# Altium PCB LinkIt Smart 7688 Duo.PcbDoc (part 1 of 3)
Units mil, origin at the board's own origin, x right, y up, seen from the top; angles counter-clockwise.
Board outline 2393.7 x 1023.62 mil, 4 copper layers (Top Layer, Mid Layer 1, Mid Layer 2, Bottom Layer), stack 40 mil thick; 184 components, 153 nets, 759 pads, 3026 vias.
Unrouted connection lines stored in the file: 1.
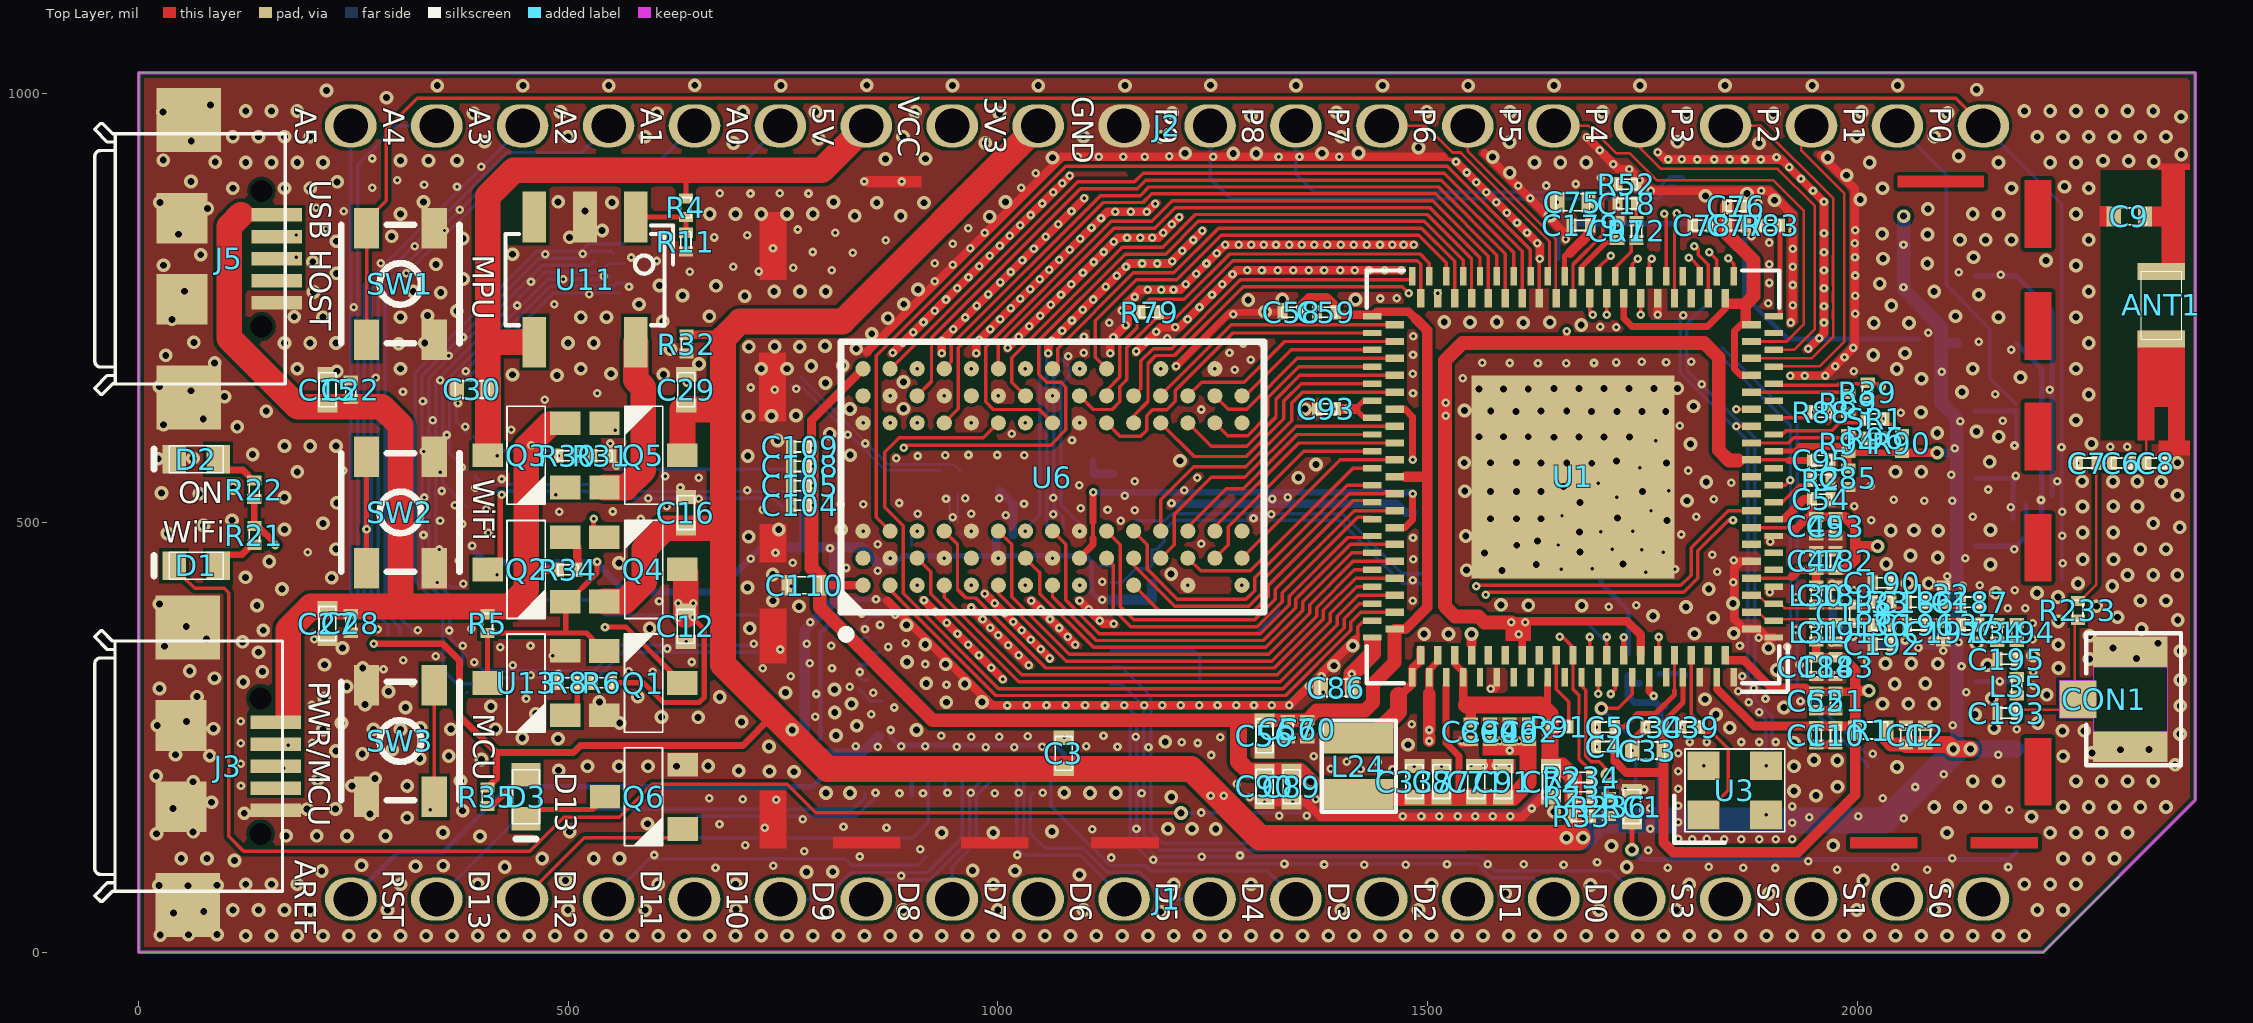
[diagram p0: Top Layer view]
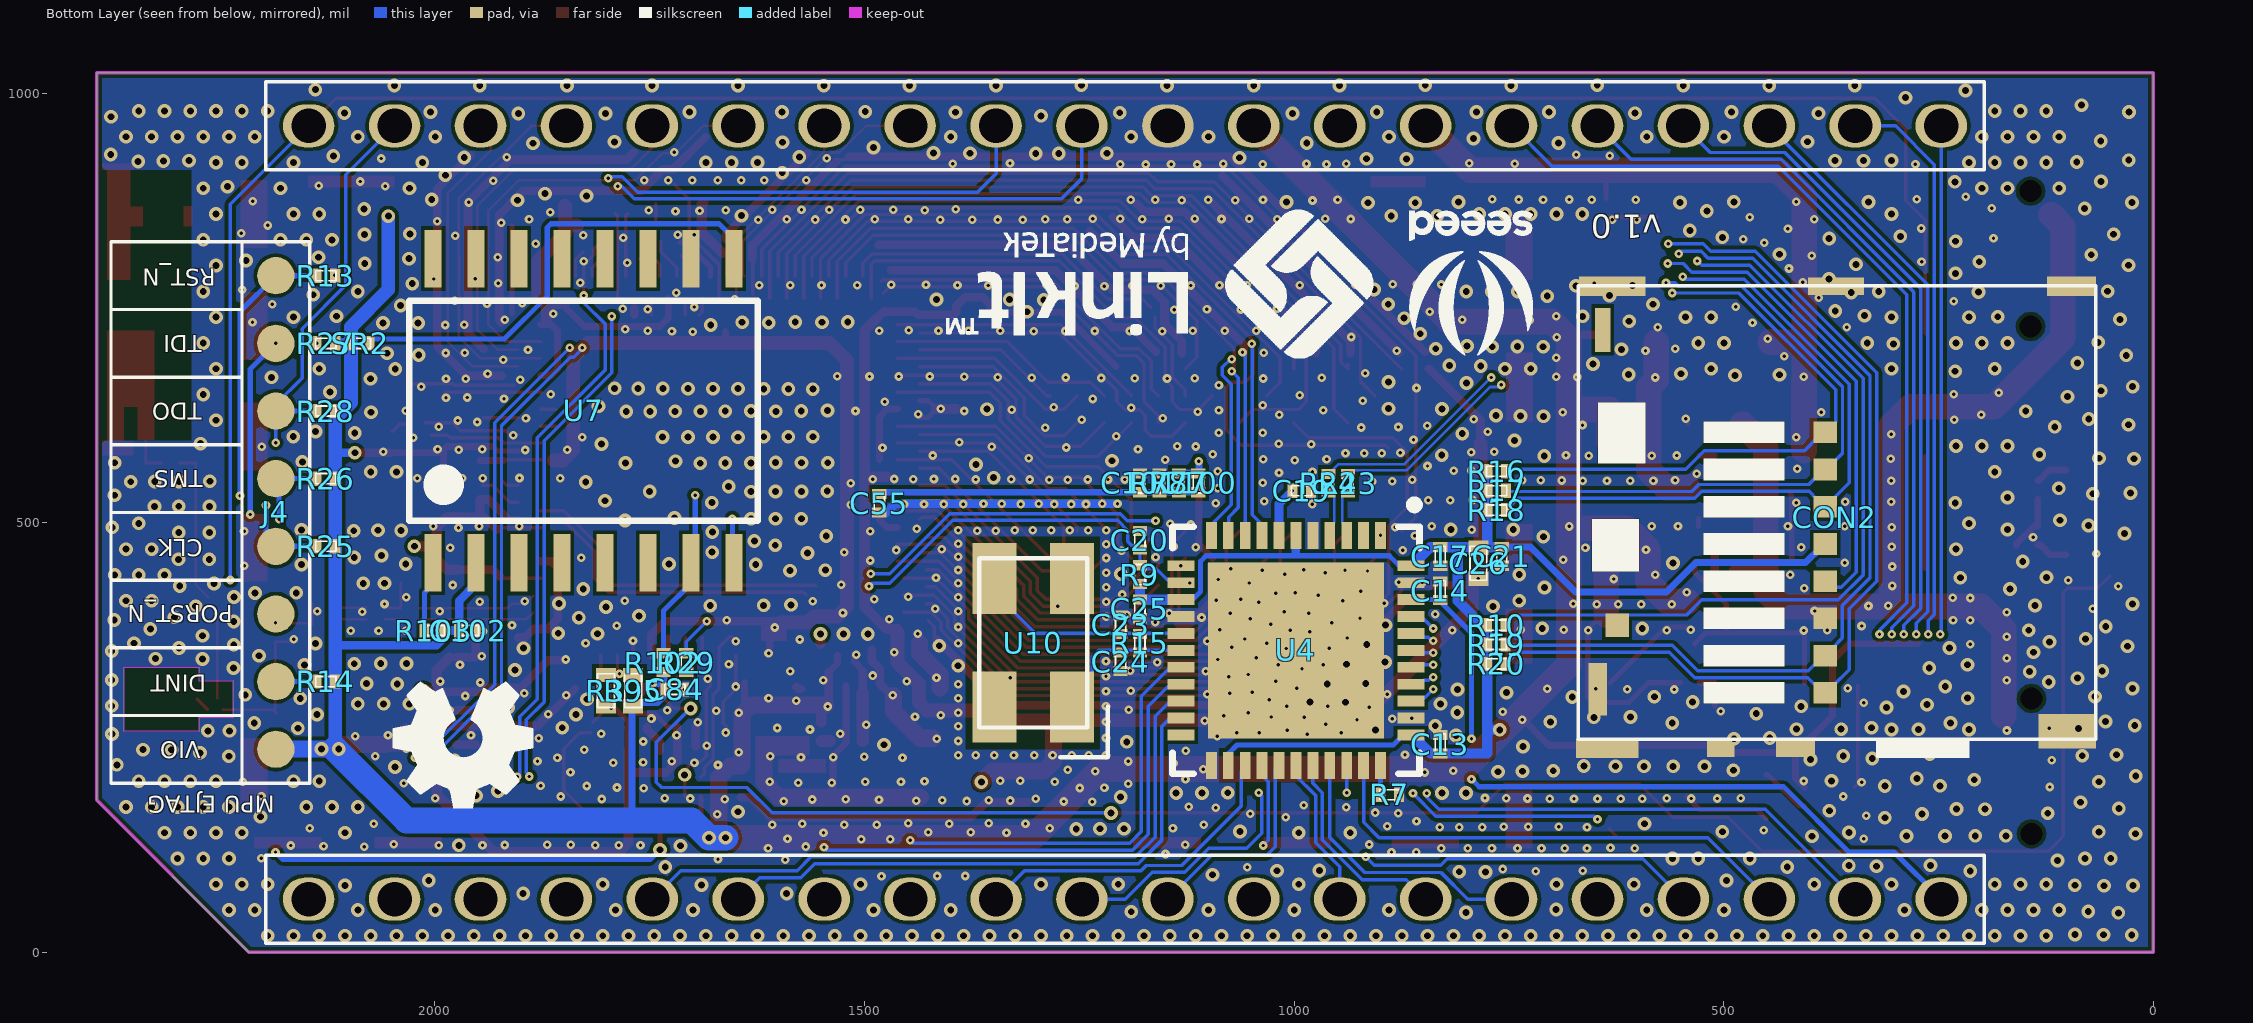
[diagram p1: Bottom Layer view, seen from below]
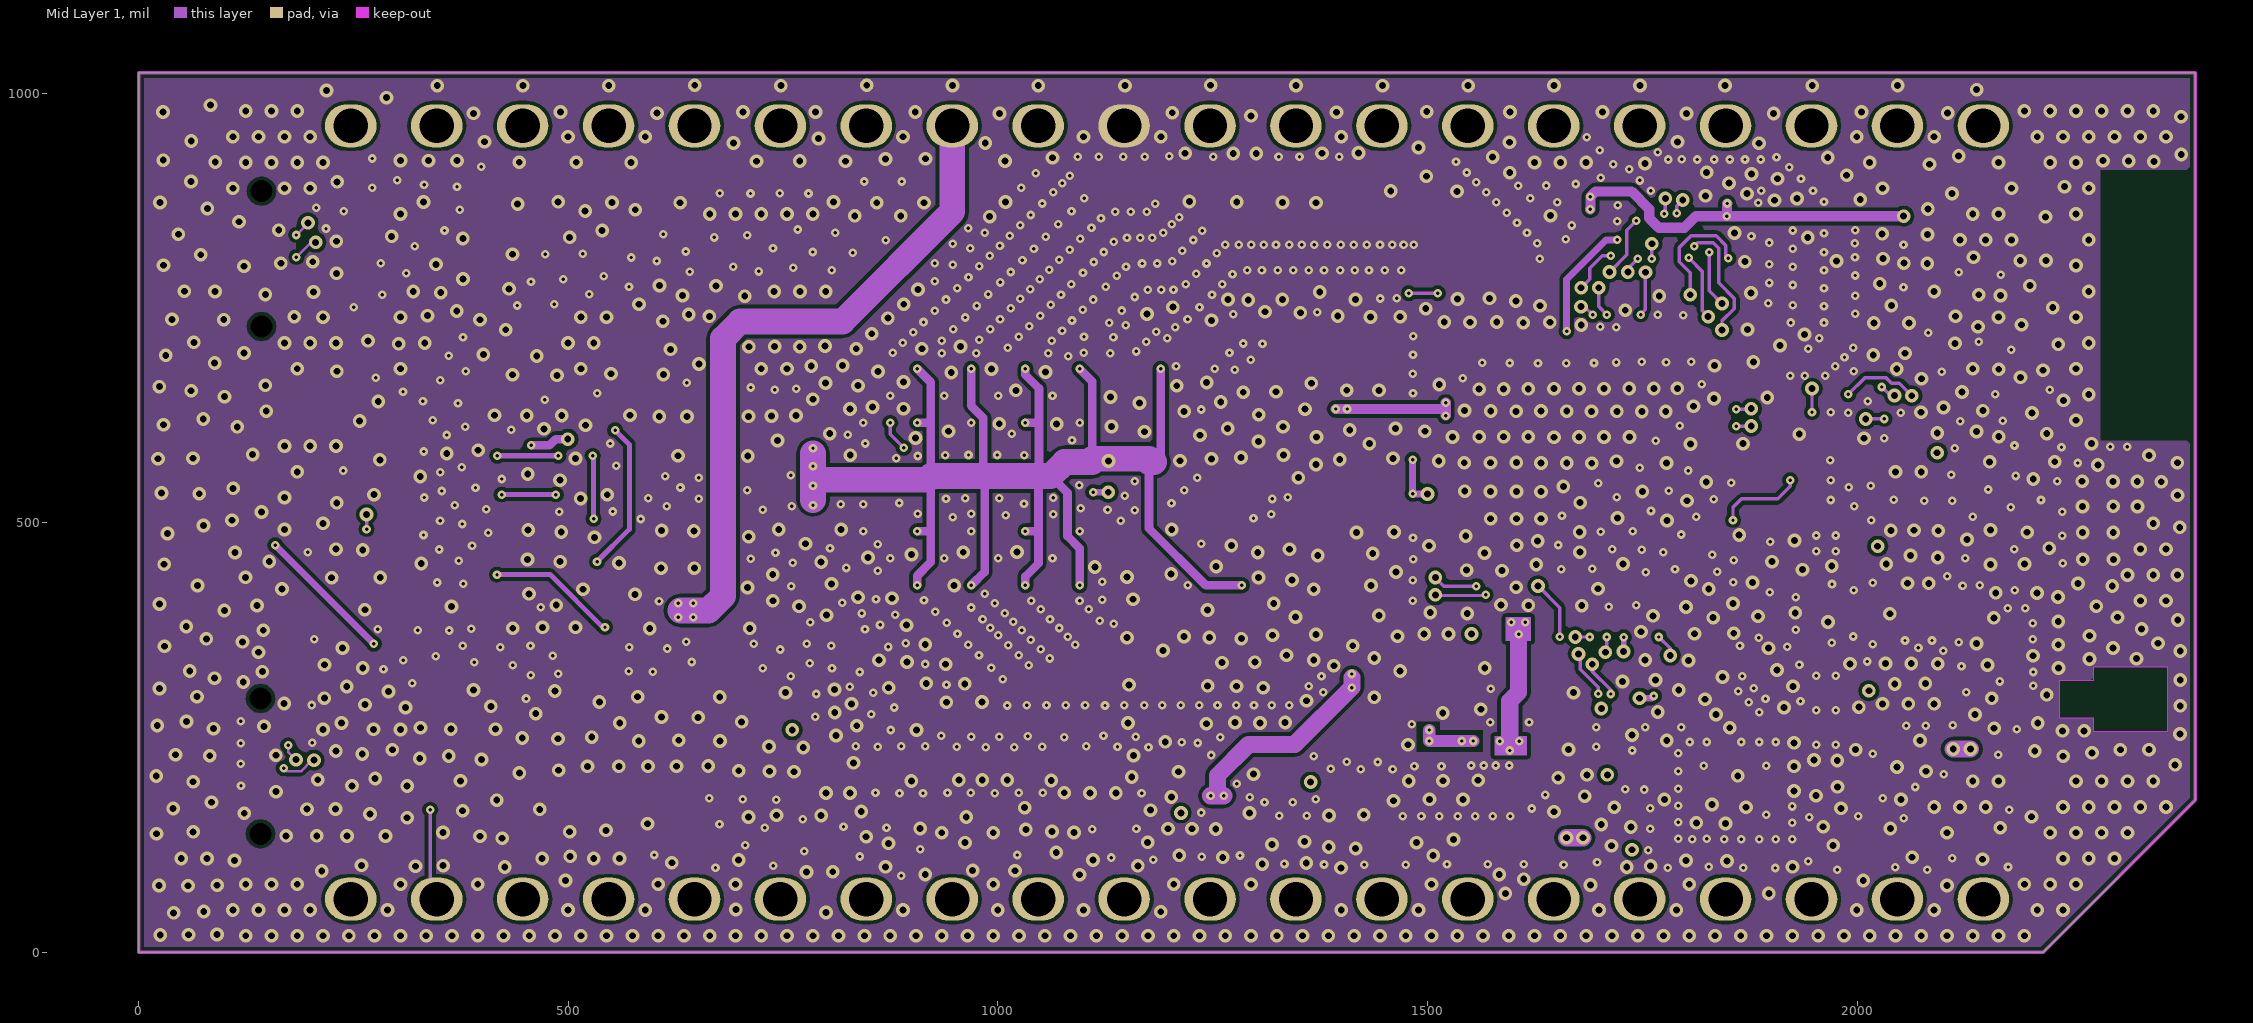
[diagram p2: Mid Layer 1]
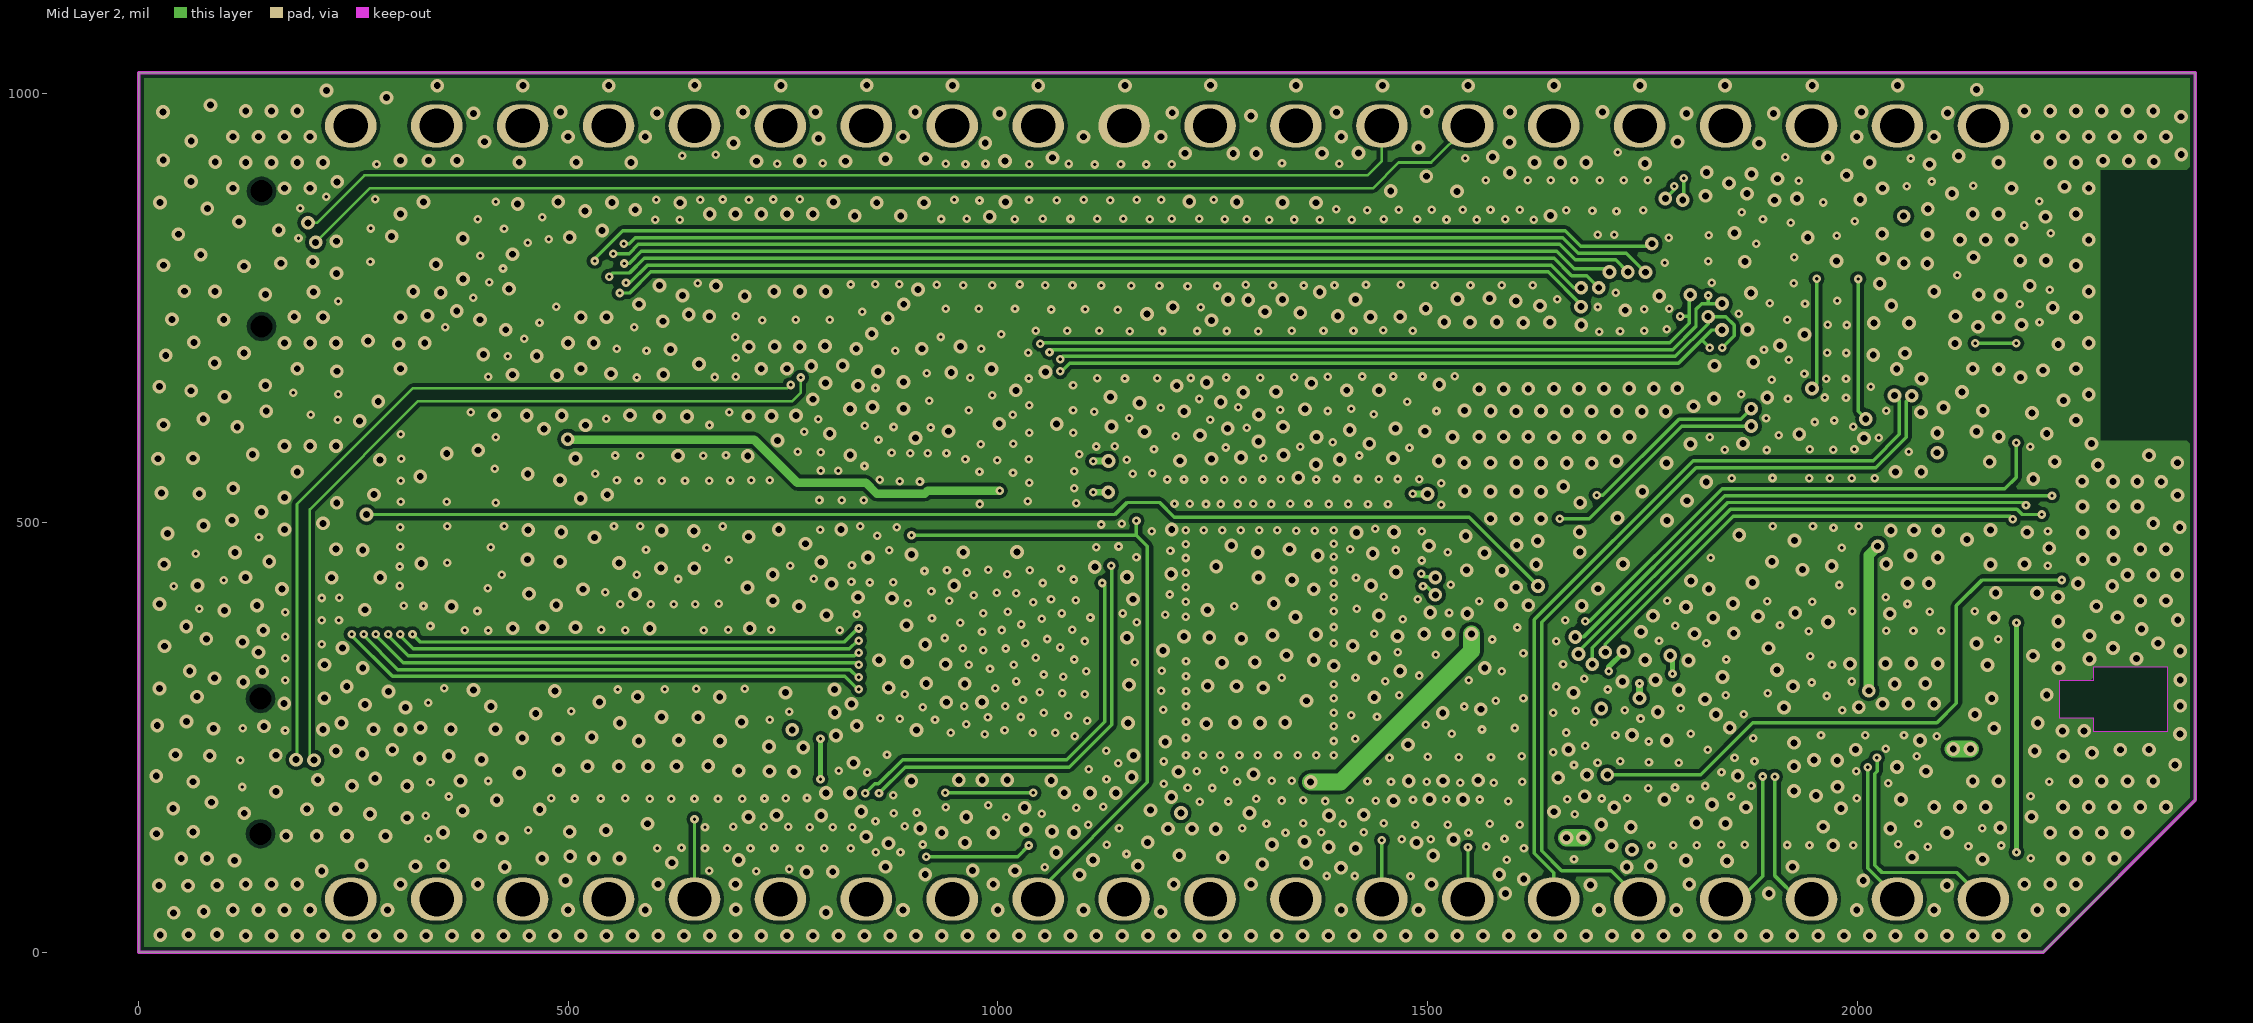
[diagram p3: Mid Layer 2]

## Layer stack, top to bottom
Top Layer: signal copper 1.0984
Dielectric1: core 2.4016, FR-4, Dk 3.3
Mid Layer 1: signal copper 1.5
Dielectric 3: prepreg 30, Dk 3.3
Mid Layer 2: signal copper 1.5
Dielectric 2: core 2.4016, FR-4, Dk 3.3
Bottom Layer: signal copper 1.0984

## Board outline
0,0 0,1023.62 2393.7,1023.62 2393.7,177.17 2216.54,0

## Design rules (kind name [scope] priority, off if disabled: settings)
Clearance [All] p1: gap=4
Clearance Keep [OnLayer('Keep-Out Layer') vs OnLayer('Top Layer')] p2: gap=4
Clearance Keep2 [OnLayer('Keep-Out Layer') vs OnLayer('Bottom Layer')] p3: gap=4
Clearance RF_IN [InPolygon vs (InNetClass('RFClass'))] p4: gap=5
DiffPairsRouting DiffPairsRouting_1 [(InNet('GPIO14 / MDI_TP_P1') OR InNet('GPIO15 / MDI_TN_P1') OR InNet('#RESET') OR InNet('#RESET'))] p1: maxlimit=10 minlimit=10 mostfreqgap=10 toplayer_minwidth=15 toplayer_maxwidth=15 toplayer_prefwidth=15 midlayer1_minwidth=15 midlayer1_maxwidth=15 midlayer1_prefwidth=15 midlayer2_minwidth=15 midlayer2_maxwidth=15 midlayer2_prefwidth=15 bottomlayer_minwidth=15 bottomlayer_maxwidth=15 bottomlayer_prefwidth=15 maxuncoupledlength=500
DiffPairsRouting [All] p2: maxlimit=10 minlimit=10 mostfreqgap=10 toplayer_minwidth=15 toplayer_maxwidth=15 toplayer_prefwidth=15 midlayer1_minwidth=15 midlayer1_maxwidth=15 midlayer1_prefwidth=15 midlayer2_minwidth=15 midlayer2_maxwidth=15 midlayer2_prefwidth=15 bottomlayer_minwidth=15 bottomlayer_maxwidth=15 bottomlayer_prefwidth=15 maxuncoupledlength=500
FabricationTestPointUsage TestPointUsage [All] p1: valid=0 allowmultiple=FALSE
FabricationTestpoint Testpoint [(IsPad And (OnTopLayer Or OnBottomLayer))] p1: side=3 testpointundercomponent=TRUE minsize=40 maxsize=100 preferedsize=60 minholesize=0 maxholesize=40 preferedholesize=32 testpointgrid=1 allowsidetop=TRUE allowsidebottom=TRUE usegrid=TRUE gridtolerance=0.01
HoleSize [All] p1: absolutevalues=TRUE maxlimit=260 minlimit=1 maxpercent=80.000 minpercent=20.000
PlaneConnect [All] p1: planeconnectstyle=Direct reliefexpansion=20 reliefentries=4 reliefconductorwidth=10 reliefairgap=10
PolygonConnect PolygonConnect_2 [(InPadClass('GND_Class'))] p1: connectstyle=Relief reliefconductorwidth=15 reliefentries=4 polygonreliefangle="90 Angle" airgapwidth=10
PolygonConnect PolygonConnect_1 [(InComponent('X') or InComponent('Y'))] p2: connectstyle=Relief reliefconductorwidth=20 reliefentries=4 polygonreliefangle="90 Angle" airgapwidth=10
PolygonConnect [All] p3: connectstyle=Direct reliefconductorwidth=10 reliefentries=4 polygonreliefangle="90 Angle" airgapwidth=10
RoutingVias [All] p1: holewidth=28 width=50 viastyle="Through Hole" minholewidth=4 minwidth=10 maxholewidth=28 maxwidth=50
SilkToSolderMaskClearance SilkscreenOverComponentPads [IsPad] p1: minsilkscreentomaskgap=10 clearancetoexposedcopper=TRUE
SolderMaskExpansion [All] p1: expansion=2
Width [All] p1: maxlimit=60 minlimit=3 preferedwidth=10
24 further rules are at their usual default settings.

## Classes and differential pairs
component class "16-MT7628AN Power-F": C84 C85 C86 C87 C88 C89 C90 C91 C92 C93 C94 C95 C96 C97 C337 L24
component class "15-MT7688AN Ethernet-E": C18 C21 C26 C76 C77 C78 CON2 J4 R10 R12 R13 R14 R16 R17 R18 R19 R20 R25 R26 R27 R28 R29 R83
component class "14-MT7688AN USB-PCIe": C15 C22 C71 C72 C75 C179 J5 R52
component class "13-MT7688AN Peripheral-C": C12 C13 C14 C16 C17 C19 C20 C23 C24 C25 C27 C28 C29 C30 C102 D1 D2 D3 J1 J2 J3 Q1 Q2 Q3 Q4 Q5 Q6 R2 R3 R4 R5 R6 R7 R8 R9 R11 R15 R21 R22 R23 R24 R30 R31 R32 R33 R34 R35 R39 R88 R89 R90 R91 R94 R95 R96 R102 R103 R234 R235 R236 RC1 SR1 SR2 SW1 SW2 SW3 U4 U7 U10 U11 U13
component class "12-MT7628AN DDR2 I_F-B": C55 C56 C57 C58 C59 C60 C100 C101 C104 C105 C108 C109 C110 R77 R78 R79 U6
pad class GND_Class: U15-43
component class "11-MT7688AN RF Front End": ANT1 C1 C2 C3 C4 C5 C6 C7 C8 C9 C10 C11 C33 C34 C39 C47 C49 C51 C52 C53 C54 C182 C183 C184 C186 C187 C188 C189 C190 C191 C192 C193 C194 C195 C196 C197 CON1 L30 L31 L32 L33 L34 L35 L36 L37 R1 R233 U1 U3

## Components (designator, comment, footprint, x,y, rotation, side; value= is the part's Value field where it differs from the comment)
ANT1 "ACA-2012-A1-CC-S" ACA-2012A 2354.1,752.97 r90 top locked
C1 "10pF" "RLC 0201 M35" 2056.69,252.76 r270 top
C2 "1uF" "RLC 0201 M35" 2079.33,252.76 r270 top
C3 "10uF" "RLC 0402 M35" 1076.57,231.5 r270 top
C4 "1uF" "RLC 0201 M35" 1707.01,239.33 r0 top
C5 "100pF" "RLC 0201 M35" 1707.01,261.97 r0 top
C6 "0.6pF" "RLC 0201 M35" 2307.54,569.39 r180 top
C7 "NI" "RLC 0201 M35" 2267.58,569.39 r0 top
C8 "1.5pF" "RLC 0201 M35" 2347.5,569.39 r180 top
C9 "NI" "RLC 0402 M35" 2316.79,856.4 r0 top locked
C10 "1uF" "RLC 0201 M35" 1974.92,252.52 r90 top
C11 "100pF" "RLC 0201 M35" 1952.28,252.52 r90 top
C12 "10uF" "RLC 0402 M35" 636.77,379.25 r90 top
C13 "0.1uF" "RLC 0201 M35" 829.92,242.13 r90 bottom
C14 "0.1uF" "RLC 0201 M35" 829.92,420.67 r270 bottom
C15 "10uF" "RLC 0402 M35" 219.76,654.68 r90 top
C16 "10uF" "RLC 0402 M35" 636.93,511.69 r270 top
C17 "1uF" "RLC 0201 M35" 829.92,460.63 r90 bottom
C18 "NI" "RLC 0201 M35" 1732.09,871.26 r0 top
C19 "0.1uF" "RLC 0201 M35" 991.14,537.2 r0 bottom
C20 "0.1uF" "RLC 0201 M35" 1179.33,479.53 r270 bottom
C21 "0.1uF" "RLC 0201 M35" 758.27,460.63 r90 bottom
C22 "0.1uF" "RLC 0201 M35" 246.81,654.76 r90 top
C23 "18pF" "RLC 0201 M35" 1201.97,381.3 r270 bottom
C24 "18pF" "RLC 0201 M35" 1201.97,337.99 r90 bottom
C25 "0.1uF" "RLC 0201 M35" 1179.33,399.61 r90 bottom
C26 "10uF" "RLC 0402 M35" 785.43,452.76 r90 bottom
C27 "10uF" "RLC 0402 M35" 219.65,382.6 r90 top
C28 "0.1uF" "RLC 0201 M35" 246.73,382.68 r90 top
C29 "10uF" "RLC 0402 M35" 637.24,654.61 r270 top
C30 "10uF" "RLC 0402 M35" 388.19,654.96 r0 top
C33 "2.2uF" "RLC 0402 M35" 1756.42,234.8 r0 top
C34 "100pF" "RLC 0201 M35" 1764.29,261.97 r0 top
C39 "3pF" "RLC 0201 M35" 1806.1,262.01 r0 top
C47 "100pF" "RLC 0201 M35" 1952.28,455.87 r270 top
C49 "100pF" "RLC 0201 M35" 1952.28,495.83 r90 top
C51 "1uF" "RLC 0201 M35" 1974.92,292.48 r90 top
C52 "100pF" "RLC 0201 M35" 1952.28,292.48 r90 top
C53 "1uF" "RLC 0201 M35" 1974.92,495.83 r90 top
C54 "100pF" "RLC 0201 M35" 1958.27,527.17 r180 top
C55 "0.1uF" "RLC 0201 M35" 1482.68,522.64 r90 bottom
C56 "2.2uF" "RLC 0402 M35" 1310.24,251.77 r90 top
C57 "1uF" "RLC 0201 M35" 1337.4,259.65 r90 top
C58 "1uF" "RLC 0201 M35" 1342.13,744.88 r0 top
C59 "1.5nF" "RLC 0201 M35" 1382.28,744.88 r0 top
C60 "1.5nF" "RLC 0201 M35" 1360.04,259.65 r90 top
C71 "4.7uF" "RLC 0402 M35" 1556.69,198.62 r270 top
C72 "4.7uF" "RLC 0402 M35" 1643.7,198.62 r90 top
C75 "4.7uF" "RLC 0402 M35" 1669.09,872.83 r0 top
C76 "1uF" "RLC 0201 M35" 1859.45,868.5 r180 top
C77 "0.1uF" "RLC 0201 M35" 1859.45,845.87 r180 top
C78 "0.1uF" "RLC 0201 M35" 1819.49,845.87 r0 top
C84 "0.1uF" "RLC 0201 M35" 1720.67,305.83 r0 bottom
C85 "0.1uF" "RLC 0201 M35" 1989.57,552.17 r90 top
C86 "2.2uF" "RLC 0402 M35" 1393.9,307.87 r0 top
C87 "10uF" "RLC 0402 M35" 1516.26,198.58 r270 top
C88 "1uF" "RLC 0201 M35" 1550.2,256.69 r90 top
C89 "2.2uF" "RLC 0402 M35" 1341.75,192.8 r90 top
C90 "4.7uF" "RLC 0402 M35" 1310.24,192.91 r90 top
C91 "4.7uF" "RLC 0402 M35" 1588.19,198.62 r270 top
C92 "0.1uF" "RLC 0201 M35" 1618.11,256.69 r270 top
C93 "0.1uF" "RLC 0201 M35" 1382.28,632.28 r0 top
C94 "0.1uF" "RLC 0201 M35" 1572.83,256.69 r270 top
C95 "0.1uF" "RLC 0201 M35" 1958.27,572.44 r180 top
C96 "0.1uF" "RLC 0201 M35" 1595.47,256.69 r270 top
C97 "0.1uF" "RLC 0201 M35" 1720.67,839.96 r270 top
C100 "0.1uF" "RLC 0201 M35" 1111.42,546.26 r90 bottom
C101 "0.1uF" "RLC 0201 M35" 1179.33,546.26 r270 bottom
C102 "0.1uF" "RLC 0201 M35" 1960.98,374.45 r0 bottom
C104 "0.1uF" "RLC 0201 M35" 770.2,520.24 r0 top
C105 "0.1uF" "RLC 0201 M35" 770.2,542.87 r0 top
C108 "0.1uF" "RLC 0201 M35" 770.2,565.51 r0 top
C109 "0.1uF" "RLC 0201 M35" 770.2,588.15 r0 top
C110 "4.7uF" "RLC 0402 M35" 774.53,427.13 r0 top
C179 "0.1uF" "RLC 0201 M35" 1678.54,845.87 r0 top
C182 "1uF" "RLC 0201 M35" 1974.92,455.87 r270 top
C183 "1uF" "RLC 0201 M35" 1974.92,332.44 r90 top
C184 "100pF" "RLC 0201 M35" 1952.28,332.44 r90 top
C186 "10pF" "RLC 0201 M35" 2069.02,407.44 r180 top
C187 "1.2pF" "RLC 0201 M35" 2131.61,407.44 r180 top
C188 "NI" "RLC 0201 M35" 1997.44,394.09 r90 top
C189 "2pF" "RLC 0201 M35" 1974.92,415.71 r270 top
C190 "NI" "RLC 0201 M35" 2028.94,429.96 r0 top
C191 "2pF" "RLC 0201 M35" 1974.92,372.4 r270 top
C192 "NI" "RLC 0201 M35" 2028.94,358.43 r180 top
C193 "3pF" "RLC 0201 M35" 2174.21,278.35 r0 top
C194 "9pF" "RLC 0201 M35" 2185.63,372.24 r90 top
C195 "3pF" "RLC 0201 M35" 2174.21,340.94 r0 top
C196 "10pF" "RLC 0201 M35" 2069.02,381.06 r180 top
C197 "1.2pF" "RLC 0201 M35" 2100.2,372.44 r90 top
C337 "10uF" "RLC 0402 M35" 1484.76,198.58 r270 top
CON1 "MHF-IPEX" "I-PEX SOCKET" 2317.91,294.49 r270 top
CON2 "MicroSD Connector" MICROSD-ST11S008V4H 66.85,511.81 r90 bottom locked
D1 "LED (Orange)" "LED 0603"#1 66.93,449.8 r0 top locked
D2 "LED (Green)" "LED 0603"#1 66.93,573.82 r0 top locked
D3 "LED (Green)" "LED 0603"#2 450.71,180.94 r90 top
J1 "Pin Header 21~40" "PIN HEADER 21 ~ 40" 1196.85,61.81 r180 top locked
J2 "Pin Header 1~20" "PIN HEADER 1~20" 1196.85,961.81 r180 top locked
J3 "MicroUSB B-Type, KMR1-MD05SMB1N-038" MICROUSB-B 57.09,216.54 r270 top locked
J4 "MPU EJTAG" "MPU EJTAG" 2185.04,511.81 r0 bottom locked
J5 "MicroUSB AB-Type, KMR1-MD05SMB1N-02" MicroUSB-AB 58.35,807.09 r270 top locked
L24 "VLS252010ET-2R2M" L/IND/SMD/VLS252010/TDK 1420.08,216.54 r270 top
L30 "10nH" "RLC 0201 M35" 1952.28,415.71 r90 top
L31 "10nH" "RLC 0201 M35" 1952.32,372.4 r270 top
L32 "2.5nH" "RLC 0201 M35" 2100.31,416.1 r90 top
L33 "1.5nH" "RLC 0201 M35" 2028.94,407.36 r180 top
L34 "1.8nH" "RLC 0201 M35" 2162.99,372.24 r90 top
L35 "1.5nH" "RLC 0201 M35" 2185.63,309.65 r90 top
L36 "1.5nH" "RLC 0201 M35" 2028.94,381.02 r180 top
L37 "2.5nH" "RLC 0201 M35" 2131.61,381.06 r180 top
Q1 "EMF30N02J" "SOT-23 - MOS" 587.13,313.27 r270 top locked
Q2 "EMF44P02J" "SOT-23 - MOS" 451.38,445.47 r90 top locked
Q3 "EMF44P02J" "SOT-23 - MOS" 451.38,578.35 r90 top locked
Q4 "EMF44P02J" "SOT-23 - MOS" 587.28,445.59 r270 top locked
Q5 "EMF30N02J" "SOT-23 - MOS" 587.4,578.35 r270 top locked
Q6 "EMF30N02J" "SOT-23 - MOS" 587.99,180.94 r90 top locked
R1 "0R" "RLC 0402 M35" 2015.75,258.07 r0 top
R2 "4.7K" "RLC 0201 M35" 1958.27,549.8 r0 top
R3 "NI" "RLC 0402 M35" 1800.79,304.53 r270 bottom
R4 "10K" "RLC 0201 M35" 636.81,866.54 r90 top
R5 "10K" "RLC 0201 M35" 405.94,382.48 r270 top
R6 "10K" "RLC 0201 M35" 539.68,313.66 r0 top
R7 "10K" "RLC 0201 M35" 888.58,183.27 r180 bottom
R8 "4K" "RLC 0201 M35" 499.65,313.66 r0 top
R9 "4.7K" "RLC 0201 M35" 1179.33,439.57 r90 bottom
R10 "10K" "RLC 0201 M35" 764.61,380.75 r180 bottom
R11 "4K" "RLC 0201 M35" 636.81,826.57 r90 top
R12 "22R" "RLC 0201 M35" 1743.31,839.96 r270 top
R13 "1K" "RLC 0201 M35" 2126.77,787.4 r180 bottom
R14 "10K" "RLC 0201 M35" 2126.77,314.96 r180 bottom
R15 "1M" "RLC 0201 M35" 1179.33,359.65 r270 bottom
R16 "10K" "RLC 0201 M35" 764.17,559.76 r180 bottom
R17 "10K" "RLC 0201 M35" 764.17,537.17 r180 bottom
R18 "10K" "RLC 0201 M35" 764.17,514.57 r180 bottom
R19 "10K" "RLC 0201 M35" 764.61,358.15 r180 bottom
R20 "10K" "RLC 0201 M35" 764.61,335.59 r180 bottom
R21 "330R" "RLC 0201 M35" 134.68,485.16 r270 top locked
R22 "330R" "RLC 0201 M35" 134.49,538.35 r90 top locked
R23 "22R" "RLC 0201 M35" 937.2,545.87 r270 bottom
R24 "22R" "RLC 0201 M35" 959.84,545.87 r270 bottom
R25 "1K" "RLC 0201 M35" 2126.77,472.44 r180 bottom
R26 "1K" "RLC 0201 M35" 2126.77,551.18 r180 bottom
R27 "1K" "RLC 0201 M35" 2126.77,708.66 r180 bottom
R28 "1K" "RLC 0201 M35" 2126.77,629.92 r180 bottom
R29 "22R" "RLC 0201 M35" 1707.48,337.13 r90 bottom
R30 "24K" "RLC 0201 M35" 499.21,577.76 r180 top
R31 "47K" "RLC 0201 M35" 539.17,577.76 r180 top
R32 "100K" "RLC 0201 M35" 637.6,707.8 r90 top
R33 "NI" "RLC 0201 M35" 1679.53,158.27 r180 top
R34 "10K" "RLC 0201 M35" 499.72,445.16 r0 top
R35 "330R" "RLC 0201 M35" 405.79,180.94 r270 top
R39 "1K" "RLC 0201 M35" 2012.2,651.97 r90 top
R52 "5.1K, 1%" "RLC 0201 M35" 1732.09,893.9 r0 top
R77 "1K, 1%" "RLC 0201 M35" 1134.05,546.26 r90 bottom
R78 "1K, 1%" "RLC 0201 M35" 1156.69,546.26 r270 bottom
R79 "120R / NI" "RLC 0201 M35" 1176.57,744.88 r0 top
R83 "24.3K, 1%" "RLC 0201 M35" 1899.41,845.87 r180 top
R88 "4.7K" "RLC 0201 M35" 1958.27,628.54 r0 top
R89 "4.7K" "RLC 0201 M35" 1989.57,638.78 r270 top
R90 "4.7K" "RLC 0201 M35" 2052.17,592.13 r270 top
R91 "4.7K" "RLC 0201 M35" 1653.35,262.6 r180 top
R94 "4.7K" "RLC 0201 M35" 1989.57,592.13 r270 top
R95 "4.7K" "RLC 0402 M35" 1769.25,304.53 r270 bottom
R96 "NI" "RLC 0201 M35" 2020.87,598.03 r0 top
R102 "4.7K" "RLC 0201 M35" 1733.9,337.13 r90 bottom
R103 "10K" "RLC 0201 M35" 2001.02,374.45 r0 bottom
R233 "0R" "RLC 0201 M35" 2256.89,397.83 r90 top
R234 "4.7K" "RLC 0201 M35" 1679.53,203.54 r180 top
R235 "20K" "RLC 0201 M35" 1679.53,180.91 r180 top
R236 "22R" "RLC 0201 M35" 1710.83,169.49 r270 top
RC1 "4.7uF" "RLC 0402 M35" 1737.99,169.49 r270 top
SR1 "22R" "RLC 0201 M35" 2020.87,620.67 r0 top
SR2 "10K" "RLC 0201 M35" 2086.77,708.66 r180 bottom
SW1 "AT-1184" AT-1184 304.53,777.76 r270 top
SW2 "AT-1184" AT-1184 304.53,511.81 r270 top locked
SW3 "AT-1184" AT-1184 304.53,245.87 r90 top locked
U1 "MT7688A" MT7628AN$2F$DRQFN156$2F$SMD$2F$P0.5$2F$12X12 1669.29,553.35 r90 top locked
U3 "E2SB40E000903E" "XTAL 2520 M50" 1857.68,188.39 r0 top
U4 "ATmega32U4" ATMEGA32U4-MU 997.83,351.38 r270 bottom locked
U6 "[Winbond] W971GG6KB-25I_128MB" BGA84C80P9X15_800X1250X120 1063.5,553.11 r90 top locked
U7 "MX25L25735FMI-10G" SOP-16 1826.97,630.24 r90 bottom locked
U10 "XTL541200-E37-133" "XTAL 5032" 1303.54,360.04 r270 bottom
U11 "XC6220B331PR-G" SOT-89-5 519.49,782.87 r180 top
U13 "MMBT3904" "SOT-23 - BJT" 451.26,313.39 r90 top

## Footprints (in the part's own frame and the unit in brackets; to place one, negate y for a bottom-side part, rotate by r counter-clockwise, add the part's x,y. Pads: shape width x height; smd on the part's side, far side on the other; paste and mask are expansions set on the pad)
ACA-2012A [mm] "ACA2012A(0805) 2 x 1.2 x 0.55 mm"
  rect 0.5x1.4 smd mask-1: 1(-1,0) 2(1,0)
  Top Layer pour cut-out: -0.75,0.75 0.75,0.75 0.75,-0.75 -0.75,-0.75
  silkscreen extent -1,-0.6 1,0.6
AT-1184 [mm] "TACT Switch"
  rect 1.2x0.75 smd mask-0.05: 1(-1.65,1) 2(1.65,1) 3(-1.65,-1) 4(1.65,-1)
  silkscreen extent -1.75,-1.75 1.75,1.75
ATMEGA32U4-MU [mm] "QFN, 44-Leads, Body 7.00x7.00mm, Pitch 0.50mm, Thermal Pad 5.20x5.20mm, IPC Medium Density"
  rect 0.8x0.32 smd mask-0.05: 1(-3.4,2.5) 2(-3.4,2) 3(-3.4,1.5) 4(-3.4,1) 5(-3.4,0.5) 6(-3.4,0) 7(-3.4,-0.5) 8(-3.4,-1) 9(-3.4,-1.5) 10(-3.4,-2) 11(-3.4,-2.5) 23(3.4,-2.5) 24(3.4,-2) 25(3.4,-1.5) 26(3.4,-1) 27(3.4,-0.5) 28(3.4,0) 29(3.4,0.5) 30(3.4,1) 31(3.4,1.5) 32(3.4,2) 33(3.4,2.5)
  rect 0.32x0.8 smd mask-0.05: 12(-2.5,-3.4) 13(-2,-3.4) 14(-1.5,-3.4) 15(-1,-3.4) 16(-0.5,-3.4) 17(0,-3.4) 18(0.5,-3.4) 19(1,-3.4) 20(1.5,-3.4) 21(2,-3.4) 22(2.5,-3.4) 34(2.5,3.4) 35(2,3.4) 36(1.5,3.4) 37(1,3.4) 38(0.5,3.4) 39(0,3.4) 40(-0.5,3.4) 41(-1,3.4) 42(-1.5,3.4) 43(-2,3.4) 44(-2.5,3.4)
  rect 5.2x5.2 smd mask-0.05: 45(0,0)
  silkscreen extent -4.42,-3.65 3.65,3.65, body extent -3.5,-3.5 3.5,3.5, height 0.85
BGA84C80P9X15_800X1250X120 [mm] "BGA, 84-Leads, Body 8.00x12.50mmx1.20mm, Pitch 0.80mm"
  round 0.45 smd mask-0.05: A1(-3.2,5.6) A2(-2.4,5.6) A3(-1.6,5.6) A7(1.6,5.6) A8(2.4,5.6) A9(3.2,5.6) B1(-3.2,4.8) B2(-2.4,4.8) B3(-1.6,4.8) B7(1.6,4.8) B8(2.4,4.8) B9(3.2,4.8) C1(-3.2,4) C2(-2.4,4) C3(-1.6,4) C7(1.6,4) C8(2.4,4) C9(3.2,4) D1(-3.2,3.2) D2(-2.4,3.2) D3(-1.6,3.2) D7(1.6,3.2) D8(2.4,3.2) D9(3.2,3.2) E1(-3.2,2.4) E2(-2.4,2.4) E3(-1.6,2.4) E7(1.6,2.4) E8(2.4,2.4) E9(3.2,2.4) F1(-3.2,1.6) F2(-2.4,1.6) F3(-1.6,1.6) F7(1.6,1.6) F8(2.4,1.6) F9(3.2,1.6) G1(-3.2,0.8) G2(-2.4,0.8) G3(-1.6,0.8) G7(1.6,0.8) G8(2.4,0.8) G9(3.2,0.8) H1(-3.2,0) H2(-2.4,0) H3(-1.6,0) H7(1.6,0) H8(2.4,0) H9(3.2,0) J1(-3.2,-0.8) J2(-2.4,-0.8) J3(-1.6,-0.8) J7(1.6,-0.8) J8(2.4,-0.8) J9(3.2,-0.8) K2(-2.4,-1.6) K3(-1.6,-1.6) K7(1.6,-1.6) K8(2.4,-1.6) K9(3.2,-1.6) L1(-3.2,-2.4) L2(-2.4,-2.4) L3(-1.6,-2.4) L7(1.6,-2.4) L8(2.4,-2.4) M2(-2.4,-3.2) M3(-1.6,-3.2) M7(1.6,-3.2) M8(2.4,-3.2) M9(3.2,-3.2) N1(-3.2,-4) N2(-2.4,-4) N3(-1.6,-4) N7(1.6,-4) N8(2.4,-4) P2(-2.4,-4.8) P3(-1.6,-4.8) P7(1.6,-4.8) P8(2.4,-4.8) P9(3.2,-4.8) R1(-3.2,-5.6) R2(-2.4,-5.6) R3(-1.6,-5.6) R7(1.6,-5.6) R8(2.4,-5.6)
  silkscreen extent -4.77,-6.25 4,6.25, body extent -4,-6.25 4,6.25, height 1.2
"I-PEX SOCKET" [mm]
  rect 1.1x1.1 smd mask-0.05: 1(0,-1.55)
  rect 0.9x2.2 smd mask-0.05: 2(1.4,0) 3(-1.4,0)
  Keep-Out Layer pour cut-out: -0.95,1.1 -0.95,-1.101 -0.551,-1.101 -0.551,-2.101 0.001,-2.101 0.55,-2.101 0.55,-1.101 0.95,-1.101 0.95,1.1
  silkscreen extent -1.95,-1.3 1.95,1.5
L/IND/SMD/VLS252010/TDK [mm]
  rect 0.89x2.05 smd mask-0.05: 1(-0.825,0)
  rect 0.9x2.05 smd mask-0.05: 2(0.825,0)
  silkscreen extent -1.35,-1.1 1.35,1.1
"LED 0603"#1 [mm]
  rect 0.7x0.85 smd mask+0.05: 1(0.65,0) 2(-0.65,0)
  silkscreen extent -1.25,-0.4 0.8,0.4
"LED 0603"#2 [mm]
  rect 0.7x0.85 smd mask+0.05: 1(0.65,0) 2(-0.65,0)
  Top Layer pour cut-out: -0.3,0.475 -0.3,-0.475 0.3,-0.475 0.3,0.475
  silkscreen extent -1.25,-0.4 0.8,0.4
MICROSD-ST11S008V4H [mm]
  rect 0.64x0.7 smd paste+0 mask+0.05: 1(2.37,8) 2(1.27,8) 3(0.17,8) 4(-0.93,8) 5(-2.03,8) 6(-3.13,8) 7(-4.23,8) 8(-5.33,8)
  rect 0.7x0.7 smd paste+0 mask+0.05: 10(-3.33,14.15)
  rect 1.55x0.55 smd paste+0 mask+0.05: 11(-5.225,14.725)
  rect 1.3x0.45 smd paste+0 mask+0.05: 12(5.4,14.575)
  rect 0.52x1.15 smd paste+0 mask+0.05: 14(-6.97,8.88)
  rect 0.52x0.82 smd paste+0 mask+0.05: 14(-6.97,11.09)
  rect 0.57x1.85 smd paste+0 mask+0.05: 14(-6.97,14.45)
  rect 1.01x1.7 smd paste+0 mask+0.05: 14(-6.465,0.85)
  rect 0.57x1.45 smd paste+0 mask+0.05: 14(6.685,0.725)
  rect 0.52x1.65 smd paste+0 mask+0.05: 14(6.685,7.68)
  rect 0.57x1.96 smd paste+0 mask+0.05: 14(6.685,14.3)
  Top Layer pour cut-out: 1.45,14.721 3.25,14.721 3.25,13.32 1.45,13.32
  Top Layer pour cut-out: -1.74,14.901 -0.19,14.901 -0.19,13.5 -1.74,13.5
  Top Layer pour cut-out: -5.65,11.6 -5.01,11.6 -5.01,9.2 -5.65,9.2
  Top Layer pour cut-out: -4.55,11.6 -3.91,11.6 -3.91,9.2 -4.55,9.2
  Top Layer pour cut-out: -3.451,11.6 -2.811,11.6 -2.811,9.2 -3.451,9.2
  Top Layer pour cut-out: -2.349,11.6 -1.709,11.6 -1.709,9.2 -2.349,9.2
  Top Layer pour cut-out: -1.25,11.6 -0.61,11.6 -0.61,9.2 -1.25,9.2
  Top Layer pour cut-out: -0.15,11.6 0.49,11.6 0.49,9.2 -0.15,9.2
  Top Layer pour cut-out: 0.95,11.6 1.59,11.6 1.59,9.2 0.95,9.2
  Top Layer pour cut-out: 2.05,11.6 2.69,11.6 2.69,9.2 2.05,9.2
  silkscreen extent -7.25,0 6.7,15.3
MicroUSB-AB [mm]
  round 0.5 hole 0.65 unplated mask+0.051: 0(-2,2.15) 0(2,2.15)
  rect 0.4x1.5 smd mask+0.051: 1(-1.3,2.6) 2(-0.65,2.6) 3(0,2.6) 4(0.65,2.6) 5(1.3,2.6)
  rect 1.5x1.5 smd mask+0.051: 6(-1.2,-0.2) 7(1.2,-0.2)
  rect 1.9x1.9 smd mask+0.051: 8(-4.1,0) 9(4.1,0)
  Keep-Out Layer lines w0.1: 3.7,-1.48 -3.7,-1.48
  silkscreen extent -4,-2.78 4,2.85
MICROUSB-B [mm]
  round 0.5 hole 0.65 unplated mask+0.051: 0(-2,2.15) 0(2,2.15)
  rect 0.4x1.5 smd mask+0.051: 1(-1.3,2.6) 2(-0.65,2.6) 3(0,2.6) 4(0.65,2.6) 5(1.3,2.6)
  rect 1.5x1.5 smd mask+0.051: 6(-1.2,-0.2) 7(1.2,-0.2)
  rect 1.9x1.9 smd mask+0.051: 8(-4.1,0) 9(4.1,0)
  Keep-Out Layer lines w0.1: 3.7,-1.45 -3.7,-1.45
  silkscreen extent -4,-2.75 4,2.8
"MPU EJTAG" [mm]
  round 1.1 smd mask-0.05: 1(0,5) 2(0,3) 3(0,1) 4(0,-1) 5(0,-3) 6(0,-5) 7(0,-7) 8(0,7)
  silkscreen extent -1,-8 4.87,8
MT7628AN$2F$DRQFN156$2F$SMD$2F$P0.5$2F$12X12 [mm]
  rect 0.19x0.55 smd mask+0.05: 1(-4.75,-5.93) 3(-4.25,-5.93) 5(-3.75,-5.93) 7(-3.25,-5.93) 9(-2.75,-5.93) 11(-2.25,-5.93) 13(-1.75,-5.93) 15(-1.25,-5.93) 17(-0.75,-5.93) 19(-0.25,-5.93) 21(0.25,-5.93) 23(0.75,-5.93) 25(1.25,-5.93) 27(1.75,-5.93) 29(2.25,-5.93) 31(2.75,-5.93) 33(3.25,-5.93) 35(3.75,-5.93) 37(4.25,-5.93) 39(4.75,-5.93) 79(4.75,5.93) 81(4.25,5.93) 83(3.75,5.93) 85(3.25,5.93) 87(2.75,5.93) 89(2.25,5.93) 91(1.75,5.93) 93(1.25,5.93) 95(0.75,5.93) 97(0.25,5.93) 99(-0.25,5.93) 101(-0.75,5.93) 103(-1.25,5.93) 105(-1.75,5.93) 107(-2.25,5.93) 109(-2.75,5.93) 111(-3.25,5.93) 113(-3.75,5.93) 115(-4.25,5.93) 117(-4.75,5.93)
  rect 0.22x0.55 smd mask+0.05: 2(-4.5,-5.275) 4(-4,-5.275) 6(-3.5,-5.275) 8(-3,-5.275) 10(-2.5,-5.275) 12(-2,-5.275) 14(-1.5,-5.275) 16(-1,-5.275) 18(-0.5,-5.275) 20(0,-5.275) 22(0.5,-5.275) 24(1,-5.275) 26(1.5,-5.275) 28(2,-5.275) 30(2.5,-5.275) 32(3,-5.275) 34(3.5,-5.275) 36(4,-5.275) 38(4.5,-5.275) 80(4.5,5.275) 82(4,5.275) 84(3.5,5.275) 86(3,5.275) 88(2.5,5.275) 90(2,5.275) 92(1.5,5.275) 94(1,5.275) 96(0.5,5.275) 98(0,5.275) 100(-0.5,5.275) 102(-1,5.275) 104(-1.5,5.275) 106(-2,5.275) 108(-2.5,5.275) 110(-3,5.275) 112(-3.5,5.275) 114(-4,5.275) 116(-4.5,5.275)
  rect 0.55x0.19 smd mask+0.05: 40(5.93,-4.75) 42(5.93,-4.25) 44(5.93,-3.75) 46(5.93,-3.25) 48(5.93,-2.75) 50(5.93,-2.25) 52(5.93,-1.75) 54(5.93,-1.25) 56(5.93,-0.75) 58(5.93,-0.25) 60(5.93,0.25) 62(5.93,0.75) 64(5.93,1.25) 66(5.93,1.75) 68(5.93,2.25) 70(5.93,2.75) 72(5.93,3.25) 74(5.93,3.75) 76(5.93,4.25) 78(5.93,4.75) 118(-5.93,4.75) 120(-5.93,4.25) 122(-5.93,3.75) 124(-5.93,3.25) 126(-5.93,2.75) 128(-5.93,2.25) 130(-5.93,1.75) 132(-5.93,1.25) 134(-5.93,0.75) 136(-5.93,0.25) 138(-5.93,-0.25) 140(-5.93,-0.75) 142(-5.93,-1.25) 144(-5.93,-1.75) 146(-5.93,-2.25) 148(-5.93,-2.75) 150(-5.93,-3.25) 152(-5.93,-3.75) 154(-5.93,-4.25) 156(-5.93,-4.75)
  rect 0.55x0.22 smd mask+0.05: 41(5.275,-4.5) 43(5.275,-4) 45(5.275,-3.5) 47(5.275,-3) 49(5.275,-2.5) 51(5.275,-2) 53(5.275,-1.5) 55(5.275,-1) 57(5.275,-0.5) 59(5.275,0) 61(5.275,0.5) 63(5.275,1) 65(5.275,1.5) 67(5.275,2) 69(5.275,2.5) 71(5.275,3) 73(5.275,3.5) 75(5.275,4) 77(5.275,4.5) 119(-5.275,4.5) 121(-5.275,4) 123(-5.275,3.5) 125(-5.275,3) 127(-5.275,2.5) 129(-5.275,2) 131(-5.275,1.5) 133(-5.275,1) 135(-5.275,0.5) 137(-5.275,0) 139(-5.275,-0.5) 141(-5.275,-1) 143(-5.275,-1.5) 145(-5.275,-2) 147(-5.275,-2.5) 149(-5.275,-3) 151(-5.275,-3.5) 153(-5.275,-4) 155(-5.275,-4.5)
  rect 6x6 smd mask-0.05: 157(0,0)
  silkscreen extent -6.35,-6.35 6.1,6.1
"PIN HEADER 1~20" [mil] "Pitch 2.54mm"
  oval 60x50 hole 40 mask+1.97: 1(-950,0) 2(-850,0) 3(-750,0) 4(-650,0) 5(-550,0) 6(-450,0) 7(-350,0) 8(-250,0) 9(-150,0) 10(-50,0) 11(50,0) 12(150,0) 13(250,0) 14(350,0) 15(450,0) 16(550,0) 17(650,0) 18(750,0) 19(850,0) 20(950,0)
"PIN HEADER 21 ~ 40" [mil] "Pitch 2.54mm"
  oval 60x50 hole 40 mask+1.97: 21(-950,0) 22(-850,0) 23(-750,0) 24(-650,0) 25(-550,0) 26(-450,0) 27(-350,0) 28(-250,0) 29(-150,0) 30(-50,0) 31(50,0) 32(150,0) 33(250,0) 34(350,0) 35(450,0) 36(550,0) 37(650,0) 38(750,0) 39(850,0) 40(950,0)
"RLC 0201 M35" [mm] "Chip RLC; Body 0.6x 0.3 mm (LxW typ)"
  rect 0.3x0.42 smd mask+0.035: 1(0.275,0) 2(-0.275,0)
  Top Layer pour cut-out: -0.125,0.22 0.125,0.22 0.125,-0.22 -0.125,-0.22
  silkscreen extent -0.3,-0.15 0.3,0.15
"RLC 0402 M35" [mm] "Chip RLC; Body 1.0x 0.5 mm (LxW typ)"
  rect 0.42x0.6 smd mask-0.05: 1(0.46,0) 2(-0.46,0)
  Top Layer pour cut-out: -0.25,0.32 0.25,0.32 0.25,-0.32 -0.25,-0.32
  silkscreen extent -0.5,-0.25 0.5,0.25
SOP-16 [mm] "SOP, 16-Leads, Body 10.30x7.52mm, Pitch 1.27mm, IPC Medium Density"
  rect 1.7x0.5 smd: 1(-4.5,4.445) 2(-4.5,3.175) 3(-4.5,1.905) 4(-4.5,0.635) 5(-4.5,-0.635) 6(-4.5,-1.905) 7(-4.5,-3.175) 8(-4.5,-4.445) 9(4.5,-4.445) 10(4.5,-3.175) 11(4.5,-1.905) 12(4.5,-0.635) 13(4.5,0.635) 14(4.5,1.905) 15(4.5,3.175) 16(4.5,4.445)
  silkscreen extent -3.25,-5.15 3.25,5.15
"SOT-23 - BJT" [mm] "3L"
  rect 0.7x0.9 smd mask-0.05: 1(-0.95,-1.15) 2(0.95,-1.15) 3(0,1.15)
  silkscreen extent -1.45,-0.55 1.45,0.58
"SOT-23 - MOS" [mm] "3L"
  rect 0.7x0.9 smd mask-0.05: 1(-0.95,-1.15) 2(0,1.15) 3(0.95,-1.15)
  silkscreen extent -1.45,-0.55 1.45,0.58
SOT-89-5 [mm]
  rect 0.7x1.5 smd: 1(-1.5,-1.85) 2(0,-1.85) 3(1.5,-1.85) 4(1.5,1.85) 5(-1.5,1.85)
  silkscreen extent -2.6,-1.6 2.35,1.35
"XTAL 2520 M50" [mm]
  rect 0.95x0.85 smd mask-0.05: 1(-0.925,-0.725) 2(0.925,-0.725) 3(0.925,0.725) 4(-0.925,0.725)
  Top Layer pour cut-out: -1.35,1.1 -1.35,0.3 -1.4,0.3 -1.4,-0.3 -1.35,-0.3 -1.35,-1.1 -0.45,-1.1 -0.45,-1.15 0.45,-1.15 0.45,-1.1 1.35,-1.1 1.35,-0.3 1.4,-0.3 1.4,0.3 1.35,0.3 1.35,1.1 0.45,1.1 0.45,1.15 -0.45,1.15 -0.45,1.1
  silkscreen extent -1.8,-1.55 1.48,1.23
"XTAL 5032" [mm]
  rect 2.1x1.3 smd mask-0.05: 1(1.9,1.15) 2(-1.9,1.15) 3(-1.9,-1.15) 4(1.9,-1.15)
  Top Layer pour cut-out: -3.139,1.972 -3.139,-1.998 -3.137,-1.995 3.137,-1.995 3.137,1.972
  silkscreen extent -2.5,-1.6 3.38,2.2

## Part data
ANT1: library part Antenna_2012
C1 C2 C3 C4 C5 C6 C7 C8 C9 C10 C11 C12 C13 C14 C15 C16 C17 C18 C19 C20 C21 C22 C23 C24 C25 C26 C27 C28 C29 C30 C33 C34 C39 C47 C49 C51 C52 C53 C54 C55 C56 C57 C58 C59 C60 C71 C72 C75 C76 C77 C78 C84 C85 C86 C87 C88 C89 C90 C91 C92 C93 C94 C95 C96 C97 C100 C101 C102 C104 C105 C108 C109 C110 C179 C182 C183 C184 C186 C187 C188 C189 C190 C191 C192 C193 C194 C195 C196 C197 C337 RC1: library part "CAP NP"
CON1: library part SMA/UFLR
CON2: library part MicroSD-ST11S008V4H, "Micro SD Card H=1.25 (ST11S008V4H)"
D1 D2 D3: library part LED
J1 J2: "Pin Header Pitch 2.54mm"
J3: library part "Micro USB TYPE-B", "MicroUSB B-Type"
J5: library part "Micro USB TYPE-AB", "MicroUSB AB-Type"
L24: library part L/0402, "IND 0805 METAL 2.2uH 0.19R 1.2A T=1.0mm"
L30 L31 L32 L34 L37: library part L/0402
L33 L35 L36: library part L/0402, "LQP03TN1N5B02D"
Q1 Q5 Q6: library part NMOS-2, "N-Channel Power MOSFET"
Q2 Q3 Q4: library part PMOS-2, "P-Channel Power MOSFET"
R1 R2 R3 R4 R5 R6 R7 R8 R9 R10 R11 R12 R13 R14 R15 R16 R17 R18 R19 R20 R21 R22 R23 R24 R25 R26 R27 R28 R29 R30 R31 R32 R33 R34 R35 R39 R52 R77 R78 R79 R83 R88 R89 R90 R91 R94 R95 R96 R102 R103 R233 R234 R235 R236 SR1 SR2: library part RES/0402_3
SW1 SW2 SW3: library part SW, "TACT Switch, H=1.5mm"
U1: library part MT7620N-n_26
U3: library part XTAL_3.2x2.5, "XTAL, 40MHz, CL=15pF, 10ppm, -30~+85C"
U4: "44-Pin, QFN, 7x7mm"
U6: library part W971GG6KB-25I, "DDR2, 128MB"
U7: library part SPIFlash-MXIC, "SPI Flash 32MB, SOP-16, H=2.65mm"
U10: library part XTAL_3.2x2.5, "XTAL, 8MHz, CL=16pF, 20ppm"
U11: library part XC6220B421PR-G, "1A, 3.3V LDO, SOT-89-5"
U13: "NPN BJT, SOT-23"

## Via types
v1: diameter 10, hole 4, Mid Layer 2 to Bottom Layer, tented bottom, 916 vias
v2: diameter 10, hole 4, Top Layer to Mid Layer 1, tented top, 915 vias
v3: diameter 16, hole 8, Top Layer to Bottom Layer, tented both sides, 776 vias
v4: diameter 16, hole 8, Mid Layer 1 to Mid Layer 2, 419 vias

## Nets (pads, with @x,y where several pads share a name; then routed paths per layer and width w, separated by ;. In a path a pad name is that pad's centre, name@x,y a point inside that pad or via, vN(x,y) a via of type N, cw(c..) or ccw(c..) an arc to the next point about the centre after c; other vN are vias at no path point)
3.3V_IN: C12.1 J2.13 Q4.2 R6.1 | length 1062.5
  Top Layer w6: R6.1@550.51,313.66 587.56,313.66 610.55,290.67 652.24,290.67 658.12,296.54 658.12,376.02 C12.1@636.77,397.36
  Top Layer w30: C12.1@636.77,392.32 C12.1@636.77,397.36 Q4.2@636.77,441.38
  Mid Layer 1 w30: 630.35,397.87 663.31,397.87 680.12,414.68 680.12,714.37 699.8,734.06 819.09,734.06 946.85,861.81 J2.13@946.85,961.81
  other v2: 628.15,389.88 645.28,389.88 628.15,406.22 645.28,406.02
3.3V_RF: C4.1 C5.1 C10.1 C11.1 C33.1 C34.1 C47.1 C49.1 C51.1 C52.1 C53.1 C54.1 C182.1 C183.1 C184.1 L30.1 L31.1 R1.2 U1.8 U1.14 U1.15 U1.149 U1.150 U1.154 U1.155 | length 1825.5
  Top Layer w4: 1787.4,304.72 U1.149@1787.4,345.67 ; U1.8@1876.97,435.24 1920.28,435.24 ; U1.14@1876.97,494.29 1922.64,494.29
  Top Layer w6: C5.1@1717.83,261.97 1728.7,261.97 1744.49,277.76 1765.35,277.76 1787.4,299.8 1787.4,304.72 ; C34.1@1775.12,261.97 1775.12,268.62 1797.24,290.75 U1.150@1797.24,319.88 ; U1.15@1902.76,504.13 U1.15@1911.64,504.13
  Top Layer w10: C5.1@1717.83,261.97 C4.1@1717.83,239.33 1717.83,222.47 1731.05,209.25 1774.53,209.25 ; C33.1@1774.53,234.8 1774.53,261.38 C34.1@1775.12,261.97 ; 1837.01,306.5 1880.16,263.35 C11.1@1948.94,263.35 ; U1.155@1849.02,339.76 1868.31,339.76 1900.39,307.68 1939.93,307.68 1944.3,303.31 C51.1@1974.92,303.31 1997.64,303.31 ; 1915.55,504.92 1937.8,527.17 C54.1@1947.44,527.17 C49.1@1947.44,509.25 ; 1924.02,436.81 1932.24,445.04 C47.1@1952.28,445.04 ; 1925.98,492.13 1928.35,492.13 1941.93,505.71 1951.34,505.71 C49.1@1952.28,506.65 C53.1@1974.92,506.65 ; C11.1@1952.28,263.35 C10.1@1974.92,263.35 R1.2@1995.87,263.35 ; L31.1@1952.28,361.54 C184.1@1952.28,343.27 C183.1@1974.92,343.27 ; L30.1@1952.28,426.54 C47.1@1952.28,445.04 ; C182.1@1974.92,445.04 C47.1@1952.28,445.04
  Top Layer w12: C33.1@1774.53,234.8 1774.53,209.25 1774.53,128.03 1786.02,116.54 1930.71,116.54 1997.64,183.46 R1.2@1997.64,258.07 1997.64,327.95 1997.64,328.35 C183.1@1982.87,343.11 ; C182.1@1974.92,445.04 1985.79,445.04 1997.64,456.89 1997.64,494.68 1985.67,506.65 C53.1@1974.92,506.65 ; 1998.03,474.8 2000.27,472.56 v3(2023.82,472.56) ; 1998.66,304.33 v3(2013.58,304.33)
  Mid Layer 2 w12: v3@2013.39,304.13 2013.39,462.13 v3(2023.82,472.56)
3.3VD: C1.1 C2.1 C3.1 C13.2 C16.1 C17.1 C21.1 C25.1 C26.1 C29.1 C72.1 C75.1 C76.1 C77.1 C78.1 C84.1 C85.1 C86.1 C88.1 C102.1 C179.1 CON2.4 J2.12 J4.8 Q4.3 Q5.2 R1.1 R9.2 R10.2 R14.1 R16.2 R17.2 R18.2 R19.2 R20.2 R21.2 R22.2 R25.1 R26.1 R27.1 R28.1 R32.1 R33.1 R35.2 R90.1 R91.1 R94.1 R95.1 R102.2 R103.2 R234.1 R235.1 SR2.2 U1.23 U1.32 U1.38 U1.41 U1.53 U1.60 U1.117 U1.123 U1.124 U1.134 U1.146 U4.6 U4.14 U4.24 U4.34 U4.44 U7.2 | length 8441.7
  Top Layer w6: U1.60@1659.45,786.81 1659.45,810.43 1663.39,814.37 ; U1.23@1902.76,582.87 1902.76,583.44 1927.34,583.44 1932.68,588.78
  Top Layer w8: R22.2@134.49,527.52 134.49,496.18 138.32,496.18 159.06,475.45 v2(159.06,473.66) ; v2(273.7,359.02) 354.17,359.02 373.5,339.69 373.5,275.12 416.3,232.32 ; R35.2@405.79,191.77 416.3,202.28 416.3,232.32 ; 738.48,276.28 703.03,240.83 514.29,240.83 505.79,232.32 416.3,232.32 ; U1.123@1531.5,345.67 1531.5,336.02 U1.124@1541.34,326.18 ; 1639.57,287.01 U1.134@1639.57,313.78 ; U1.53@1728.35,761.02 1728.35,737.8 1737.99,728.15 1825.98,728.15 1846.46,748.62 ; U1.146@1757.87,310.04 1757.87,303.74 v2(1763.39,298.23) ; U1.32@1876.97,671.46 1864.76,671.46 1857.28,678.94 1857.28,723.03 1864.76,730.51 U1.38@1876.97,730.51 ; 1932.68,588.78 1985.83,588.78 1989.57,585.04 C85.1@1989.57,566.73 ; R94.1@1989.57,581.3 R90.1@2052.17,581.3
  Top Layer w10: R32.1@637.6,718.62 675.87,718.62 ; 1541.34,292.13 U1.124@1541.34,326.18 ; R90.1@2052.17,581.3 v3(2093.11,581.3)
  Top Layer w12: C88.1@1550.2,267.52 1550.2,288.39 ; 1665.73,813.8 1689.37,837.44 C179.1@1689.37,845.87 1689.37,870.67 C75.1@1687.2,872.83 ; U1.41@1849.21,754.72 1870.47,754.72 U1.38@1870.47,733.46
  Top Layer w16: C78.1@1834.65,845.87 C77.1@1848.62,845.87 ; C76.1@1848.62,868.5 C77.1@1848.62,845.87 ; 1870.47,754.72 1879.33,763.58 1879.33,805.31 1848.62,836.02 C77.1@1848.62,845.87 ; R1.1@2033.86,258.07 2033.86,247.44 2039.37,241.93 C1.1@2056.69,241.93
  Top Layer w20: v2(1412.01,307.87) v2(1412.01,323.82) 1435.83,347.64 1435.83,359.84 ; 1545.47,287.6 1632.05,287.6 1642.52,277.13 R91.1@1642.52,262.6 1642.52,217.91 C72.1@1643.7,216.73 1656.1,216.73 1669.51,203.32 1669.51,144.88 ; C1.1@2056.69,241.93 C2.1@2079.33,241.93 2106.3,241.93 v3(2111.81,236.42) v3(2131.89,236.42)
  Top Layer w30: Q4.3@542.01,408.19 565.51,408.19 588.31,430.98 588.31,469.61 612.28,493.58 671.97,493.58 ; 632.91,592.95 632.91,631.81 678.74,631.81 ; J2.12@1046.85,961.81 819.13,734.09 699.84,734.09 680.12,714.37 680.12,334.65 738.48,276.28 801.38,213.39 C3.1@1076.57,213.39 1224.71,213.39 1304.75,133.34 v3@1675.32,133.34
  Mid Layer 1 w8: v2(159.06,473.66) v2(273.7,359.02) ; v4(1746.65,295.67) 1760.83,295.67 v2(1763.39,298.23)
  Mid Layer 1 w12: v2(1689.37,864.57) 1689.57,864.76 v2(1689.57,879.13) 1695.87,885.43 1737.4,885.43 1757.91,864.92 1757.91,854.49 1769.29,843.11 1798.97,843.11 1812.36,856.5 v2(1848.43,856.5) ; v2(1848.62,871.46) 1848.43,871.26 v2(1848.43,856.5) ; v3@2054.13,856.5 v2(1848.43,856.5)
  Mid Layer 1 w20: v2(1247.44,182.09) v2(1262.8,182.09) ; 1255.51,182.28 1255.51,205.71 1291.73,241.93 1345.47,241.93 1412.01,308.46 v2@1412.01,319.49 ; v3(1661.81,133.27) v3(1680.91,133.27) ; v3(2111.81,236.42) v3(2131.89,236.42)
  Mid Layer 2 w8: v4(1746.65,295.67) v1(1746.65,312.8)
  Mid Layer 2 w20: v3(1661.81,133.27) v3(1680.91,133.27) ; v3(2111.81,236.42) v3(2131.89,236.42)
  Bottom Layer w6: U4.44@863.98,449.8 877.56,449.8 889.17,461.42 1102.42,461.42 1108.72,455.12 1108.72,419.82 U4.14@1119.88,408.66 ; U4.34@875.79,250 884.65,241.14 1066.54,241.14 1076.57,231.1 U4.24@1076.57,217.52
  Bottom Layer w8: CON2.4@386.93,471.34 404.72,453.54 532.01,453.54 566.34,419.21 672.4,419.21 724.65,471.46 C21.1@758.27,471.46 ; R102.2@1733.15,322.01 1733.15,298.15 1740.63,290.67 1765,290.67 R95.1@1769.25,286.42 ; C84.1@1736.85,312.8 v1(1746.65,312.8) ; 1770.68,153.85 1770.68,284.99 R95.1@1769.25,286.42 ; R95.1@1776.69,286.42 R95.1@1769.25,286.42
  Bottom Layer w10: 997.83,463.58 U4.6@997.83,485.24 ; U7.2@1951.97,453.07 1951.97,428.78 1971.81,408.94 C102.1@1971.81,374.45 R103.2@1990.2,374.45 1990.2,365 1998.02,357.18 2114.46,357.18 ; v3(2093.11,581.3) 2114.76,581.3
  Bottom Layer w12: C21.1@758.27,471.46 809.65,471.46 ; v3(760.63,258.86) 775.2,258.86 ; C26.1@775,474.8 R16.2@775,559.76 ; U4.34@860.63,250.98 840.94,231.3 775.2,231.3 775.2,258.86 ; U4.44@860.63,452.17 841.34,471.46 809.65,471.46 ; U4.14@1131.69,410.43 C25.1@1179.33,410.43 R9.2@1179.33,428.74 ; SR2.2@2102.95,708.66 R27.1@2115.94,708.66 ; 775.2,258.86 775.2,374.8 809.65,409.25 809.65,471.46
  Bottom Layer w16: v3(2054.13,856.69) 2054.13,771.14 2097.44,727.83 2097.44,639.57 2115.94,621.06 R26.1@2115.94,551.18 R25.1@2115.94,472.44 R14.1@2115.94,314.96 v3@2115.94,236.42
  Bottom Layer w20: v3@2125.2,236.42 v3(2131.89,236.42) J4.8@2184.84,236.42
  Bottom Layer w30: v3(1661.81,133.27) v3(1680.91,133.27) 1700.98,153.35 2032.87,153.35 v3@2115.94,236.42
5V_OUT: C30.1 J2.14 Q3.2 R4.1 R30.1 U11.4 | length 921.3
  Top Layer w6: R4.1@636.81,877.36 636.81,905.91
  Top Layer w30: C30.1@406.3,654.96 406.3,709.92 ; Q3.2@406.38,583.7 C30.1@406.38,666.54 ; 445.87,710.12 445.67,709.92 406.3,709.92 ; J2.14@846.85,961.81 795.08,910.04 436.61,910.04 406.3,879.72 406.3,709.92
  Mid Layer 1 w6: v2(417.44,577.8) 417.48,577.76 v2(488.39,577.76)
5V_USB: C15.2 C19.1 C22.2 C27.1 C28.1 J3.1 J5.1 Q3.3 R5.2 R34.2 U4.7 | length 1865.7
  Top Layer w10: 452.83,445.16 R34.2@488.9,445.16
  Top Layer w30: 118.98,858.31 105.39,844.72 105.39,714.61 185.16,634.84 282.91,634.84 304.76,612.99 304.76,409.41 ; J3.1@173.98,275.04 173.98,375.87 200.67,402.56 432.24,402.56 450.98,421.3 450.98,587.48 478.03,614.53
  Mid Layer 1 w10: v2(456.81,589.88) 477.91,589.88 485.2,597.17 v4(499.41,597.17)
  Mid Layer 2 w10: v4(499.41,597.17) 500.19,596.39 716.45,596.39 766.5,546.34 846.3,546.34 858.82,533.83 915,533.83 918.38,537.2 v1(1001.97,537.2)
  Bottom Layer w10: v1(1001.97,537.2) 1017.52,521.65 U4.7@1017.52,485.24
#RESET: C20.1 J1.39 R9.1 SW3.3 SW3.4 U1.19 U4.13 | length 2249.4
  Top Layer w4: SW3.4@343.9,310.83 343.9,196.22 SW3.3@348.27,191.85 ; v2(1567.52,415.94) 1570.54,418.97 1798.2,418.97 1814.69,435.47 1814.69,467.36 1850.29,502.95 v2(1855.51,502.95) ; U1.19@1902.76,543.5 1916.14,543.5 v2(1922.05,549.41)
  Mid Layer 1 w4: v2(339.17,165.71) 339.17,69.49 J1.39@346.85,61.81 ; v4(1509.06,415.94) 1509.82,415.18 1566.76,415.18 v2(1567.52,415.94) ; v2(1855.51,502.95) 1855.51,517.72 1865.35,527.56 1907.48,527.56 1922.05,542.13 v2(1922.05,549.41)
  Mid Layer 2 w4: J1.39@346.85,61.81 J1.39@346.85,71.06 ; v1(845.67,185.24) 856.5,196.07 861.03,196.07 888.98,224.02 1080.27,224.02 1124.46,268.21 1124.46,426.72 v1(1121.46,429.72) ; v1(1494.68,426.18) 1498.82,426.18 v4(1509.06,415.94)
  Bottom Layer w4: J1.39@346.85,61.81 451.38,166.34 831.45,166.34 845.67,180.56 v1(845.67,185.24) ; U4.13@1131.69,430.12 1144.09,430.12 1160.43,446.46 1175.39,446.46 R9.1@1179.33,450.39 C20.1@1179.33,468.7 1184.25,468.7 1193.6,478.05 1193.6,490.75 1205.41,502.56 1397.24,502.56 1470.45,429.35 1491.51,429.35 v1(1494.68,426.18)
AREF: C14.1 J1.40 U4.42 | length 866
  Mid Layer 2 w6: v1(793.5,201.57) v1(793.5,248.43)
  Bottom Layer w4: C14.1@826.99,406.42 826.99,406.91 C14.1@829.92,409.84
  Bottom Layer w6: J1.40@246.85,61.81 301.77,116.73 354.33,116.73 430.2,192.61 784.54,192.61 v1(793.5,201.57) ; v1(793.5,248.43) 793.5,371.65 829.92,408.07 C14.1@829.92,409.84 ; C14.1@830.51,410.43 U4.42@863.98,410.43
CLK_N: R79.2 U1.76 U6.K8 | length 487.7
  Top Layer w4: U6.K8@1126.5,647.6 1126.5,654.06 1141.93,669.49 1141.93,707.13 1161.81,727.02 R79.2@1161.81,739.76 ; R79.2@1166.54,750.2 1176.18,759.84 1216.93,759.84 1269.71,812.62 1491.41,812.62 1501.97,802.06 U1.76@1501.97,786.81
CLK_P: R79.1 U1.77 U6.J8 | length 548.8
  Top Layer w4: U6.J8@1095,647.6 1110.91,631.69 1132.87,631.69 1141.93,640.75 1141.93,658.07 1149.96,666.1 1149.96,703.8 1184.74,738.58 1207.03,738.58 1273.07,804.62 1488.09,804.62 1492.13,800.59 U1.77@1492.13,761.02
DDR_BA0: U1.100 U6.L2 | length 391.7
  Top Layer w4: U6.L2@1157.99,458.62 1157.99,450.38 1205.54,402.83 1292,402.83 1306.83,417.66 1306.83,431.64 1408.96,533.76 1449.14,533.76 1451.14,535.76 1455.68,535.76 U1.100@1457.68,533.76
DDR_BA1: U1.99 U6.L3 | length 391.1
  Top Layer w4: U6.L3@1157.99,490.12 1173.62,474.49 1173.62,446.06 1208.86,410.83 1288.69,410.83 1298.83,420.97 1298.83,436.04 1406.3,543.5 U1.99@1435.83,543.5
DDR_BA2: U1.101 U6.L1 | length 353.6
  Top Layer w4: U6.L1@1157.99,427.13 1190.29,394.83 1295.32,394.83 1314.83,414.34 1314.83,426.84 1413.76,525.76 1433.88,525.76 U1.101@1435.83,523.82
DDR_CASN: U1.75 U6.L7 | length 453.6
  Top Layer w4: U6.L7@1157.99,616.1 1157.99,624.33 1174.63,640.97 1174.63,685.25 1183.87,694.49 1205.51,694.49 1285.65,774.62 1470.65,774.62 v2(1478.35,766.93)
  Mid Layer 1 w4: v2(1478.35,766.93) v2(1512.01,766.93)
DDR_CSN: U1.78 U6.L8 | length 403.1
  Top Layer w4: U6.L8@1161.61,651.22 U6.L8@1157.99,647.6 1166.14,655.75 1166.14,688.19 1180.52,702.57 1202.12,702.57 1280.46,780.91 1280.62,780.91 1282.33,782.62 1478.6,782.62 U1.78@1480.32,780.91
DDR_IO_1V8_MT7628: C56.1 C57.1 C58.1 C59.1 C60.1 C89.1 C90.1 C100.1 C104.1 C105.1 C108.1 C109.1 C110.1 R77.1 U1.79 U1.98 U1.116 U1.125 U6.A1 U6.A9 U6.C1 U6.C3 U6.C7 U6.C9 U6.E1 U6.E9 U6.G1 U6.G3 U6.G7 U6.G9 U6.J1 U6.J9 U6.M9 U6.R1 | length 4081.9
  Top Layer w10: C109.1@783.07,591.73 783.07,619.13 U6.A9@843.03,679.09 ; C110.1@792.64,427.13 U6.A1@843.03,427.13 ; C58.1@1352.95,744.88 1352.95,753.35 1362.01,762.4 1382.68,762.4 1393.11,751.97 C59.1@1393.11,744.88 1396.26,741.73 1437.4,741.73 1441.14,745.47 1477.95,745.47 1486.81,736.61
  Top Layer w12: U1.116@1461.61,376.18 1474.41,376.18 1499.61,401.38 1499.61,553.35 ; 1474.8,553.35 1499.61,553.35 ; 1486.81,736.61 1499.61,723.82 1499.61,553.35 ; 1551.18,358.86 v3(1551.18,370.28)
  Top Layer w16: C109.1@783.07,591.73 783.07,447.24 792.64,437.68 C110.1@792.64,427.13 792.64,401.46 924.21,269.88 C56.1@1310.24,269.88 1359.45,269.88 C60.1@1360.04,270.47 1370.87,281.3 1427.17,281.3 1436.61,290.75 1436.61,312.2 1461.61,337.2 U1.116@1461.61,372.05
  Top Layer w20: 1280.12,266.73 1280.12,221.85 1291.05,210.91 C89.1@1341.75,210.91 1351.09,210.91 v3(1363.98,198.03)
  Mid Layer 1 w10: v2(906.02,427.13) 906.02,438.31 921.85,454.13 921.85,554.33 921.85,663.27 v2(906.02,679.09) ; v2(906.02,490.12) 921.69,490.12 ; v2(906.02,616.1) 920.31,616.1 ; v2(969.02,427.13) 984.45,442.56 984.45,553.15 ; v2(969.02,679.09) 969.02,635.9 983.02,621.9 983.02,556.94 985.63,554.33 ; v2(1032.01,427.13) 1032.01,437.32 1047.24,452.56 1047.24,552.36 ; v2(1032.01,490.12) 1046.81,490.12 ; v2(1032.01,616.1) 1047.09,616.1 ; v2(1032.01,679.09) 1032.01,671.93 1047.83,656.1 1047.83,567.91 ; 1061.42,554.33 1081,534.75 1081,484.32 1095,470.32 v2(1095,427.13) ; v2(1095,679.09) 1109.84,664.25 1109.84,574.41 ; 1175.79,574.41 1175.79,493.31 1241.97,427.13 v2(1283.98,427.13) ; 1189.49,578.43 v2(1189.49,679.09)
  Mid Layer 1 w30: 784.76,526.38 v2(784.76,542.87) ; 784.76,580.32 v2(784.76,542.87) ; 1109.84,570.47 1077.56,570.47 1061.42,554.33 985.63,554.33 921.85,554.33 917.52,550 784.76,550 v2(784.76,542.87) ; 1109.84,574.41 1175.79,574.41 ; 1175.79,570.47 1181.69,570.47
  Mid Layer 2 w8: v1(1110.83,571.65) v4(1128.54,571.65)
  Mid Layer 2 w20: v3(1363.98,198.03) 1398.62,198.03 1551.18,350.59 v3(1551.18,370.28)
  Bottom Layer w8: C100.1@1110.83,557.68 v1(1110.83,571.65)
  Bottom Layer w10: C100.1@1111.42,557.09 R77.1@1134.05,557.09
  other v2: 784.76,520.24 784.76,565.51 784.76,586.57
DDR_MCKE: U1.103 U6.K2 | length 432.5
  Top Layer w4: U6.K2@1126.5,458.62 1134.06,451.06 1134.06,399.32 1154.54,378.83 1301.94,378.83 1330.83,407.72 1330.83,418.45 1418.46,506.08 1433.88,506.08 U1.103@1435.83,504.13
DDR_MDQM0: U1.108 U6.F3 | length 606.8
  Top Layer w4: U6.F3@1000.51,490.12 1015.95,474.68 1015.95,413.78 1082.9,346.83 1315.2,346.83 1362.83,394.46 1362.83,404.48 1413.27,454.92 U1.108@1461.61,454.92
DDR_MDQM1: U1.64 U6.B3 | length 1134.2
  Top Layer w4: U6.B3@874.53,490.12 858.46,506.18 858.46,694.1 1078.99,914.62 1522.77,914.62 1619.49,817.91 U1.64@1619.49,786.81
DDR_MDQS0: U1.113 U6.F7 | length 950.8
  Top Layer w4: U6.F7@1000.51,616.1 983.03,598.62 885.04,598.62 868.31,581.89 868.31,517.88 889.57,496.62 889.57,417.91 1000.65,306.83 1331.77,306.83 1402.83,377.89 1402.83,387.92 1420.63,405.71 U1.113@1428.35,405.71
DDR_MDQS1: U1.72 U6.B7 | length 948.9
  Top Layer w4: v2(890.35,587.01) 893.5,590.16 1061.42,590.16 1079.13,607.87 1079.13,657.68 1073.62,663.19 1056.89,663.19 1047.44,672.64 1047.44,712.01 1148.03,812.6 1195.27,812.6 1233.29,850.62 1496.26,850.62 1541.34,805.55 U1.72@1541.34,786.81
  Mid Layer 1 w4: v2(874.53,616.1) 874.53,602.83 v2(890.35,587.01)
DDR_MODT: U1.74 U6.K9 | length 540.1
  Top Layer w4: U6.K9@1126.5,679.09 1113.19,692.4 1113.19,734.78 1161.01,782.6 1207.99,782.6 1260.02,834.62 1489.64,834.62 1521.65,802.61 U1.74@1521.65,786.81
DDR_RASN: U1.81 U6.K7 | length 382.6
  Top Layer w4: U6.K7@1126.5,616.1 1141.81,600.79 1166.14,600.79 1172.99,607.64 1172.99,624.57 1179.92,631.5 1196.46,631.5 1206.13,641.17 1206.13,653.75 1273.04,720.67 U1.81@1435.83,720.67
DDR_VREF: C55.1 C100.2 C101.1 R77.2 R78.1 U1.90 U1.104 U6.J2 | length 694.5
  Top Layer w5: 1110.75,482.02 1110.75,500.47
  Top Layer w8: U6.J2@1095,458.62 1110.75,474.37 1110.75,482.02 ; 1110.75,500.47 v2@1110.75,535.24 ; U1.104@1461.61,494.29 1473.62,494.29 1482.68,503.35 v1(1482.68,533.46) ; U1.90@1461.61,632.09 1473.82,632.09 1482.68,623.23 v2(1482.68,573.23)
  Mid Layer 1 w8: v1(1110.83,535.43) v4(1128.35,535.43) ; v2(1482.68,573.23) v1(1482.68,533.46) v4(1499.8,533.46)
  Mid Layer 2 w8: v1(1110.83,535.43) v4(1128.35,535.43) ; v1(1482.68,533.46) v4(1499.8,533.46)
  Bottom Layer w8: v1(1110.83,535.43) 1480.71,535.43 v1(1482.68,533.46)
  other v2: 1482.68,533.46 1110.83,535.43
DDR_WEN: U1.102 U6.K3 | length 479
  Top Layer w4: U6.K3@1126.5,490.12 1142.32,474.29 1142.32,402.36 1157.86,386.83 1298.63,386.83 1322.83,411.03 1322.83,422.44 1414.47,514.08 U1.102@1461.22,514.08
EJTAG_DINT: J4.1 R14.2 | length 47.4
  Bottom Layer w6: R14.2@2137.6,314.96 J4.1@2185.04,314.96
EJTAG_PORST_N: J4.2 R33.2 R235.2 R236.1 RC1.1 | length 828
  Top Layer w6: R235.2@1690.35,180.91 R33.2@1690.35,158.27 1731.1,158.27 RC1.1@1737.99,151.38 v3(1737.99,119.29)
  Mid Layer 2 w6: v1@2185.43,116.54 v1(2185.43,383.66)
  Bottom Layer w6: v3(1737.99,119.29) 1749.41,107.87 2176.97,107.87 v1(2185.43,116.34)
EPHY_LED0_N: J2.2 J4.5 R28.2 R29.1 | length 1124.2
  Mid Layer 2 w4: v1(1683.46,385.24) 1688.5,385.24 1842.76,539.5 2171.98,539.5 2185.04,552.56 v1(2185.04,593.11)
  Bottom Layer w4: v1(1683.46,385.24) 1707.48,361.22 R29.1@1707.48,347.95 ; J2.2@2046.85,961.81 2103.74,904.92 2103.74,776.54 2154.53,725.75 2154.53,668.31 J4.5@2185.04,637.8 ; v1(2185.04,593.11) J4.5@2185.04,629.92
  Bottom Layer w6: R28.2@2137.6,629.92 J4.5@2185.04,629.92